# Altium PCB SkyTotalExternal.PcbDoc
Units mm, origin at the board's own origin, x right, y up, seen from the top; angles counter-clockwise.
Board outline 27.18 x 14.48 mm, 2 copper layers (Top Layer, Bottom Layer); 3 components, 6 nets, 14 pads, 0 vias.
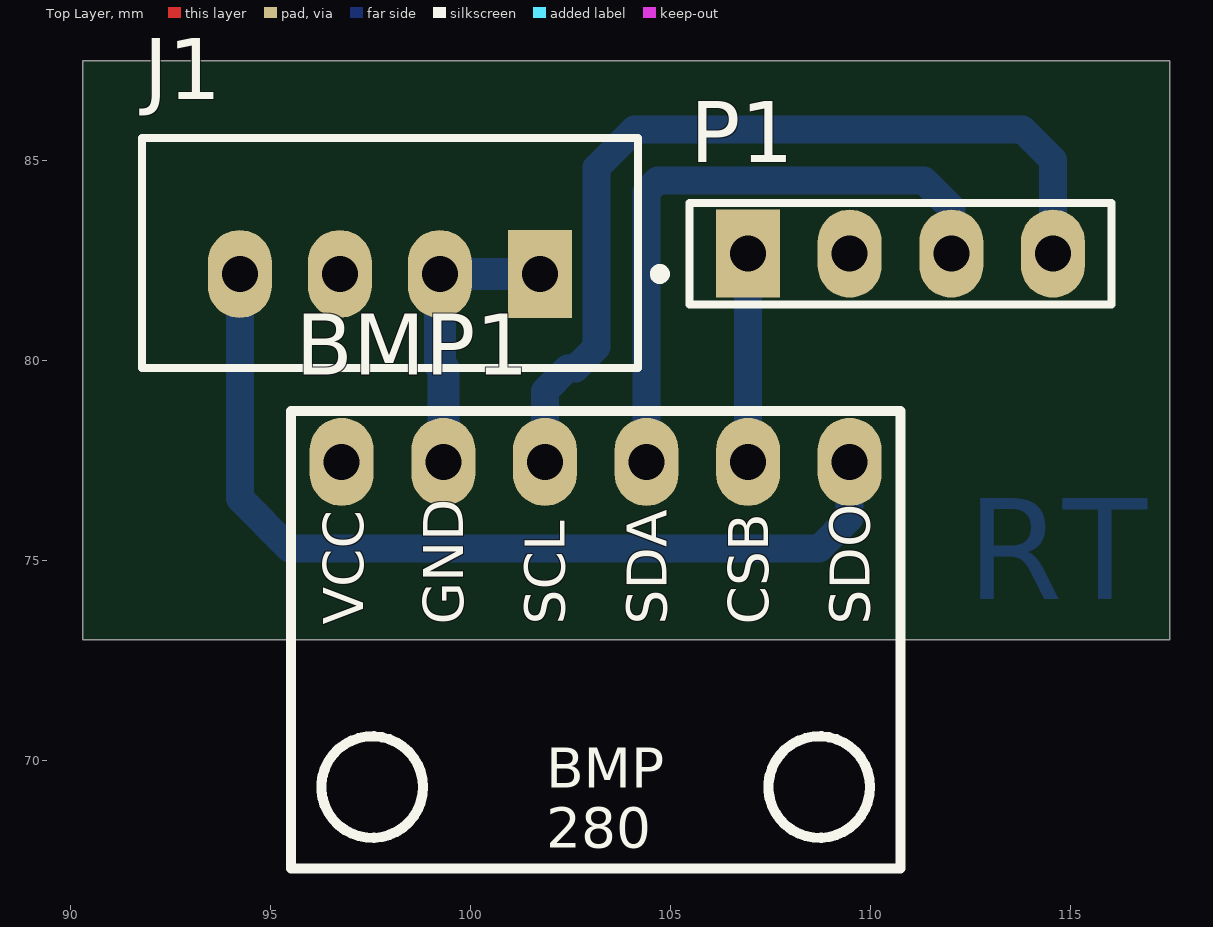
[diagram p0: Top Layer view]
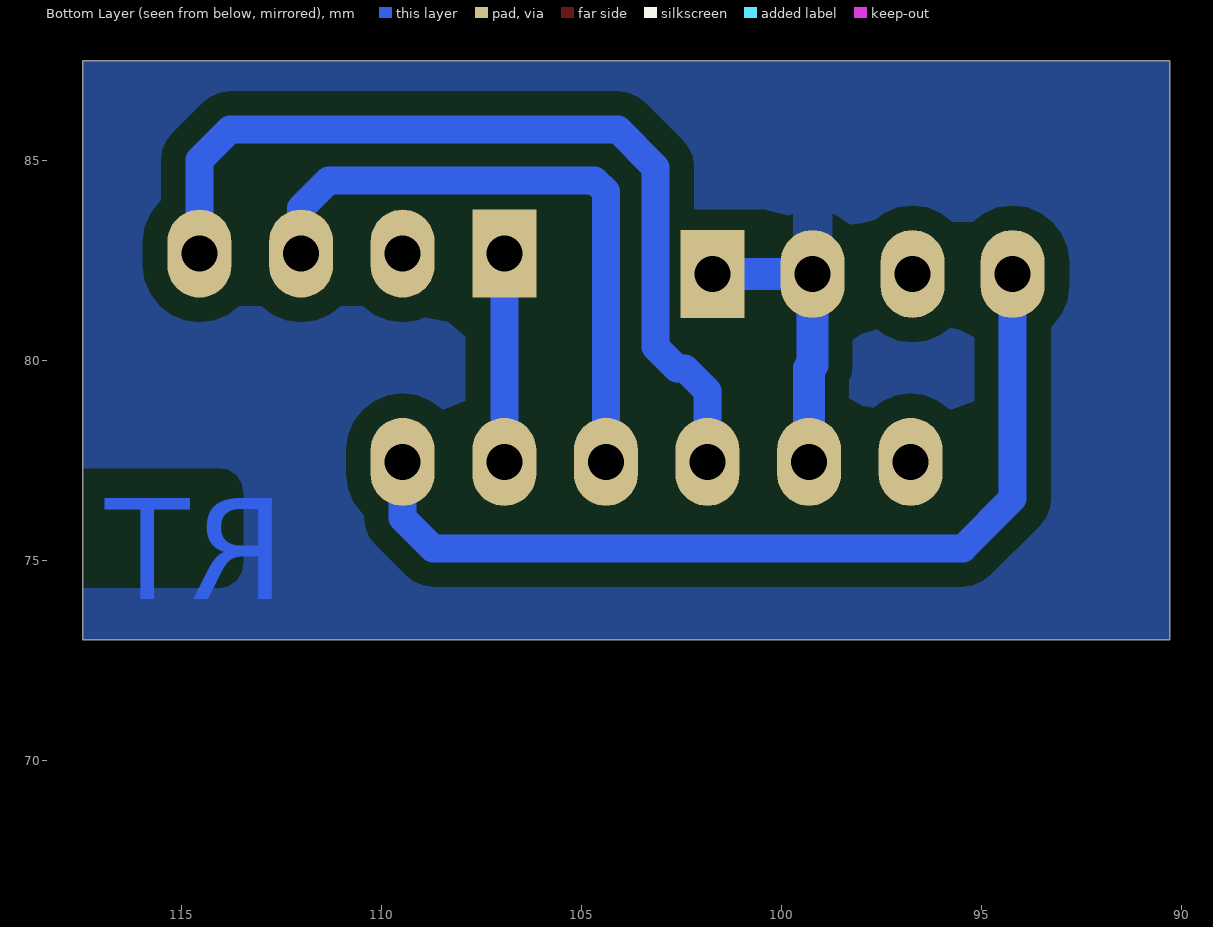
[diagram p1: Bottom Layer view, seen from below]
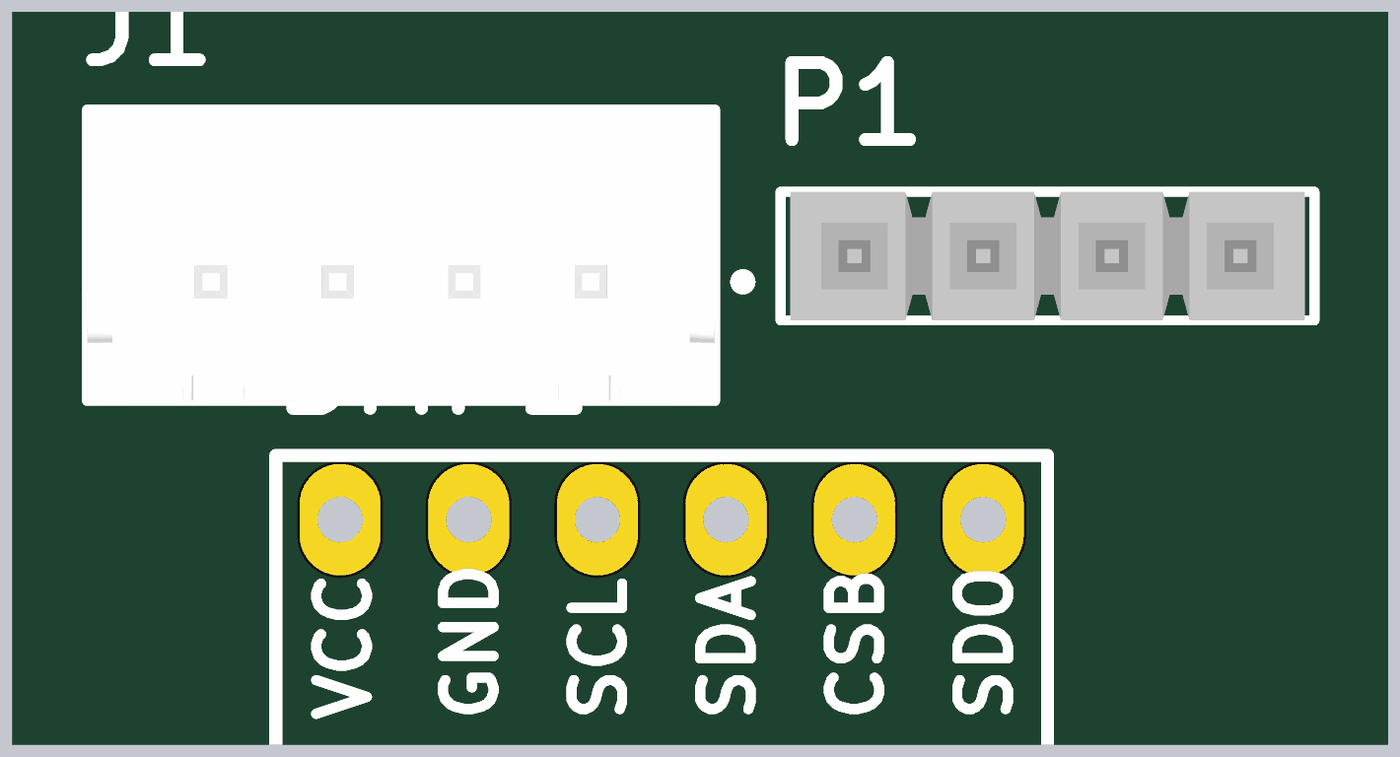
[diagram p2: 3D render of the assembled board from above, using the file's embedded part models]

## Layer stack, top to bottom
Top Solder: solder mask 0.0102, Solder Resist, Dk 3.5
Top Layer: signal copper 0.0356
Dielectric 1: dielectric 0.32, FR-4, Dk 4.8
Bottom Layer: signal copper 0.0356
Bottom Solder: solder mask 0.0102, Solder Resist, Dk 3.5

## Board outline
90.297,73.025 90.297,87.503 117.475,87.503 117.475,73.025

## Design rules (kind name [scope] priority, off if disabled: settings)
Clearance Clearance_1 [InNamedPolygon('PolygonSL')] p1: gap=0.6 ignorepadtopadclearanceinfootprint=FALSE
Clearance [All] p2: gap=0.254 ignorepadtopadclearanceinfootprint=FALSE
PlaneClearance [All] p1: clearance=0.8
PlaneConnect [All] p1: planeconnectstyle=Relief reliefexpansion=0.508 reliefentries=4 reliefconductorwidth=0.5 reliefairgap=0.254
PolygonConnect [All] p1: connectstyle=Relief reliefconductorwidth=1 reliefentries=4 polygonreliefangle="90 Angle" airgapwidth=0.5
RoutingLayers [All] p1: top layer_v5=FALSE bottom layer_v5=TRUE
RoutingVias [All] p1: holewidth=0.711 width=1.27 viastyle="Through Hole" minholewidth=0.711 minwidth=1.27 maxholewidth=0.711 maxwidth=1.27
SolderMaskExpansion [All] p1: expansion=0.102 istentingtop=FALSE
SupplyNets "Schematic Supply Nets_1" [InNet('GND')] p1: voltage=0.000
SupplyNets "Schematic Supply Nets" [InNet('VCC')] p2: voltage=0.000
Width Width_1 [InNetClass('POWER')] p1: maxlimit=1 minlimit=0.8 preferedwidth=0.8
Width [InNetClass('Signal')] p2: maxlimit=0.8 minlimit=0.7 preferedwidth=0.7
27 further rules are at their usual default settings.

## Classes and differential pairs
net class Signal: NetBMP1_3 NetBMP1_4 NetBMP1_5 NetBMP1_6
net class POWER: GND VCC
component class SkyTotalExternal: 1 BH1

## Components (designator, comment, footprint, x,y, rotation, side; value= is the part's Value field where it differs from the comment)
BMP1 "BMP280" BMP280 101.733,73.683 r90 top
J1 "B4B-XH-A(LF)(SN)" FP-B4B-XH-A_LF_SN-MFG 97.977,82.694 r0 top
P1 "UART" SMTC-TSW-104-08-X-S 106.934,82.677 r0 top

## Footprints (in the part's own frame and the unit in brackets; to place one, negate y for a bottom-side part, rotate by r counter-clockwise, add the part's x,y. Pads: shape width x height; smd on the part's side, far side on the other; paste and mask are expansions set on the pad)
BMP280 [mm]
  oval 2.2x1.6 hole 0.9 paste-2539.97 mask+0.051: 1(3.787,4.959) 2(3.787,2.419) 3(3.787,-0.121) 4(3.787,-2.661) 5(3.787,-5.201) 6(3.787,-7.741)
  silkscreen extent -6.37,-9.01 5.06,6.23, body extent -6.3,-9 5.2,5.8, height 5.3
FP-B4B-XH-A_LF_SN-MFG [mm]
  rect 1.6x2.2 hole 0.9 paste-2539.97 mask+0: 1(3.75,-0.525)
  oval 1.6x2.2 hole 0.9 paste-2539.97 mask+0: 2(1.25,-0.525) 3(-1.25,-0.525) 4(-3.75,-0.525)
  silkscreen extent -6.2,-2.88 6.88,2.87, body extent -6.3,-2.98 6.3,2.98, height 0.25
SMTC-TSW-104-08-X-S [mm] ".025 SQ Post Terminal Strip Assembly, 1x4 Pins, Vertical, 2.54mm Pitch, Male"
  rect 1.6x2.2 hole 0.9: 1(0,0)
  oval 1.6x2.2 hole 0.9: 2(2.54,0) 3(5.08,0) 4(7.62,0)
  silkscreen extent -1.46,-1.27 9.08,1.27, body extent -1.27,-1.27 8.89,1.27, height 8.38

## Part data
J1: library part CMP-17439-000250-1, "CONN HEADER VERT 4POS 2.5MM", Color=Natural, Contact Resistance=20mR, Current Rating=3A, Flammability Rating="UL94 V-0", Housing Color=White, Insulation Resistance=1GR, Max Operating Temperature=85°C, Max Voltage Rating (AC)=250V, Min Operating Temperature=-25°C, Package Quantity=500, Connector Type=Header, Contact Finish - Mating=TIN, Contact Material=Brass, Contact Plating=Tin, Contact Shape=Square, Contact Type="Male Pin", Depth=5.75mm, Fastening Type=Detent, Gender=Male, Housing Material=Polyamide, Insulation Color=Natural, Insulation Material=Nylon, Lead Free="Lead Free", Lead Pitch=2.5mm, Length=12.4mm, Mated Stacking Heights=9.8mm, Material=Polyamide, Max Current Rating=3A, Max Voltage Rating (DC)=250V, Mount="Through Hole", Number of Contacts=4, Number of Positions=4, Number of Rows=1, Orientation=Straight, Packaging=Bulk, Pitch=2.5mm, REACH SVHC="No SVHC", Series=XH, Termination=Solder, Voltage Rating=250V, Voltage Rating (AC)=250V, Wire/Cable Gauge=22AWG
P1: library part CMP-1024-00357-1, "0.025\" SQ Post Header, Through-hole, Vertical, -55 to 125 degC, 2.54 mm Pitch, 4-Pin, Male, RoHS", Manufacturer=Samtec, PartNumber=TSW-104-08-G-S, Temperature Range="-55 to 125 degC", ComponentLink1Description="Manufacturer URL", ComponentLink1URL=http://www.samtec.com, ComponentLink2Description=Datasheet, ComponentLink2URL=http://www.samtec.com/documents/webfiles/pdf/TSW_TH.PDF, ComponentLink3Description="Package Specification", ComponentLink3URL=http://www.samtec.com/documents/webfiles/cpdf/TSW-XXX-XX-XXX-X-XX-XXX-MKT.pdf, DatasheetVersion=F-214, Mounting Technology=Through-hole, Orientation=Vertical, PackageDescription=".025[0.64] SQ. Post Terminal Strip Assembly", PackageReference=TSW-104-08-X-S, PackageVersion="DM, 8/1988", Pitch="2.54 mm", RoHS=True

## Nets (pads, with @x,y where several pads share a name; then routed paths per layer and width w, separated by ;. In a path a pad name is that pad's centre, name@x,y a point inside that pad or via, vN(x,y) a via of type N, cw(c..) or ccw(c..) an arc to the next point about the centre after c; other vN are vias at no path point)
GND: BMP1.2 J1.1 J1.2 | length 7.2
  Bottom Layer w0.8: BMP1.2 99.314,79.807 99.227,79.894 J1.2 J1.1
NetBMP1_3: BMP1.3 P1.4 | length 22.5
  Bottom Layer w0.7: BMP1.3 101.854,79.248 102.413,79.807 102.616,79.807 103.149,80.34 103.149,84.836 104.089,85.776 113.792,85.776 114.554,85.014 P1.4
NetBMP1_4: BMP1.4 P1.3 | length 15.9
  Bottom Layer w0.7: BMP1.4 104.394,84.226 104.673,84.506 111.328,84.506 112.014,83.82 P1.3
NetBMP1_5: BMP1.5 P1.1 | length 5.2
  Bottom Layer w0.7: BMP1.5 P1.1
NetBMP1_6: BMP1.6 J1.4 | length 23.1
  Bottom Layer w0.7: J1.4 94.227,76.556 95.472,75.311 108.712,75.311 109.474,76.073 BMP1.6
VCC: BMP1.1
pads on no net: J1.3 P1.2

## Polygon pours and split planes (outlines as drawn)
GND on Bottom Layer "PolygonSL" (solid, pour order 0): 90.297,73.025 90.297,87.503 117.475,87.503 117.475,73.025

## Other copper
Bottom Layer:
  text "RT" at 112.395,74.041 h2.52

## Text inside footprints (layer, text, board x,y; h text height)
BMP1: Top Overlay "BMP / 280" at 101.892,67.826 h1; Top Overlay "SDO" at 109.974,73.406 h1 r90; Top Overlay "CSB" at 107.434,73.406 h1 r90; Top Overlay "SDA" at 104.894,73.406 h1 r90; Top Overlay "SCL" at 102.354,73.406 h1 r90; Top Overlay "GND" at 99.814,73.406 h1 r90; Top Overlay "VCC" at 97.312,73.406 h1 r90